# Altium PCB V_2.PcbDoc
Units mm, origin at the board's own origin, x right, y up, seen from the top; angles counter-clockwise.
Board outline 70.23 x 20.07 mm, 3 copper layers (Top Layer, GND, Bottom Layer), stack 0.615 mm thick; 5 components, 23 nets, 72 pads, 78 vias.
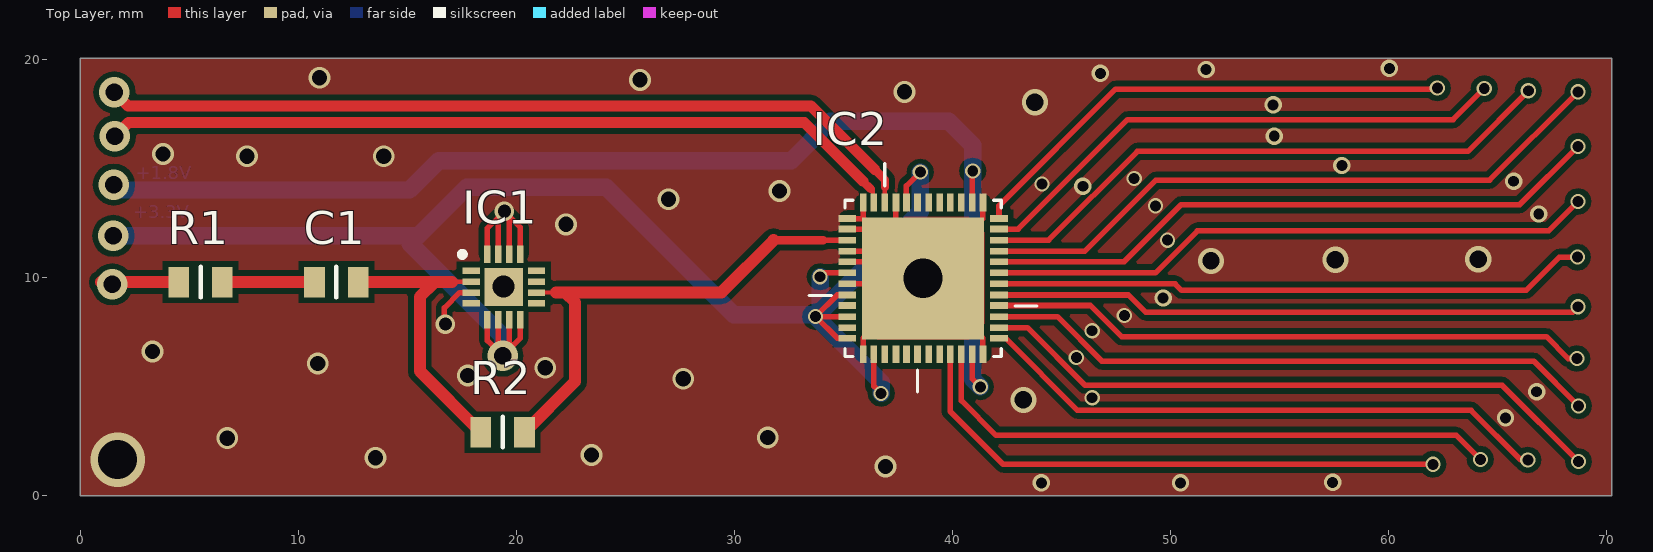
[diagram p0: Top Layer view]
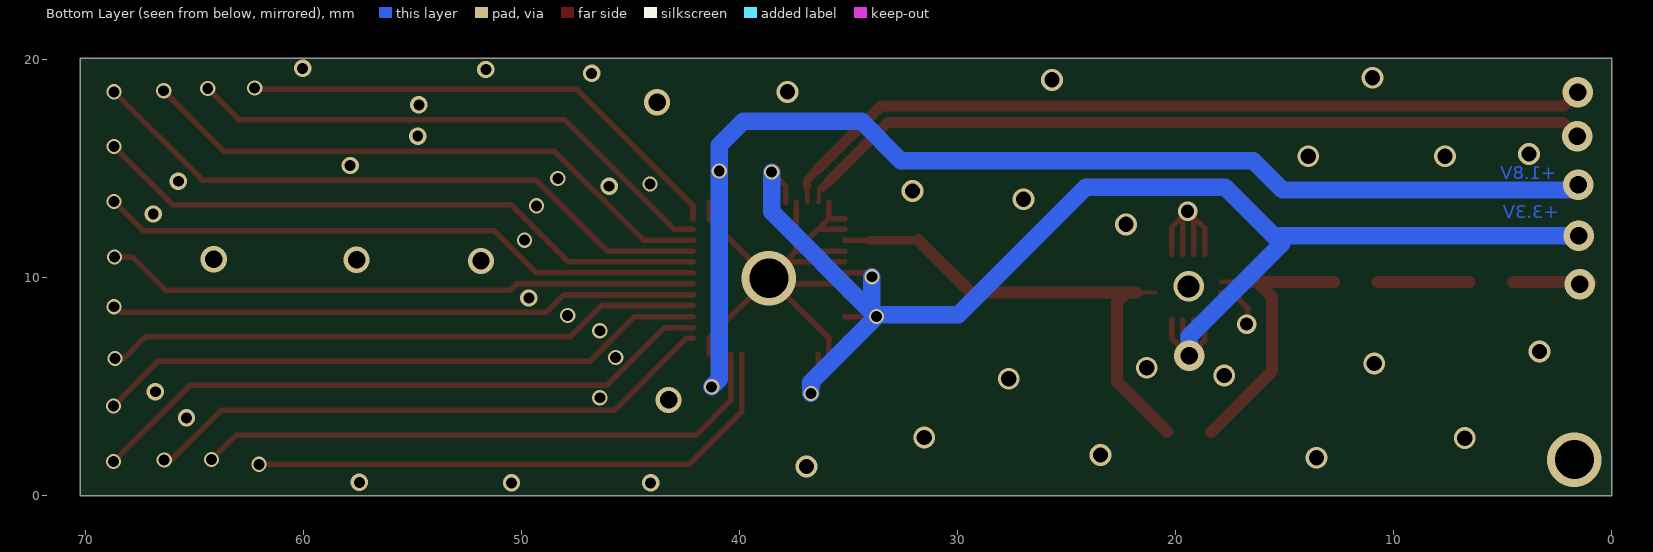
[diagram p1: Bottom Layer view, seen from below]
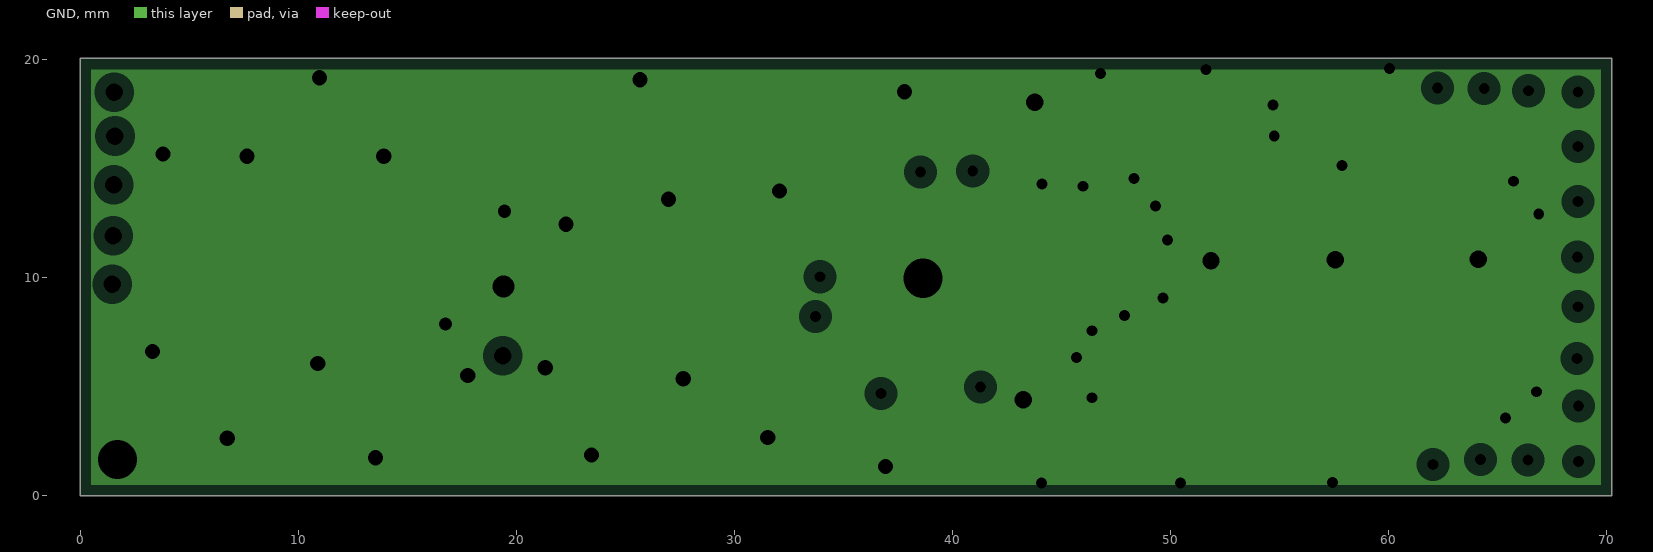
[diagram p2: GND, clearances drawn from the general rule]
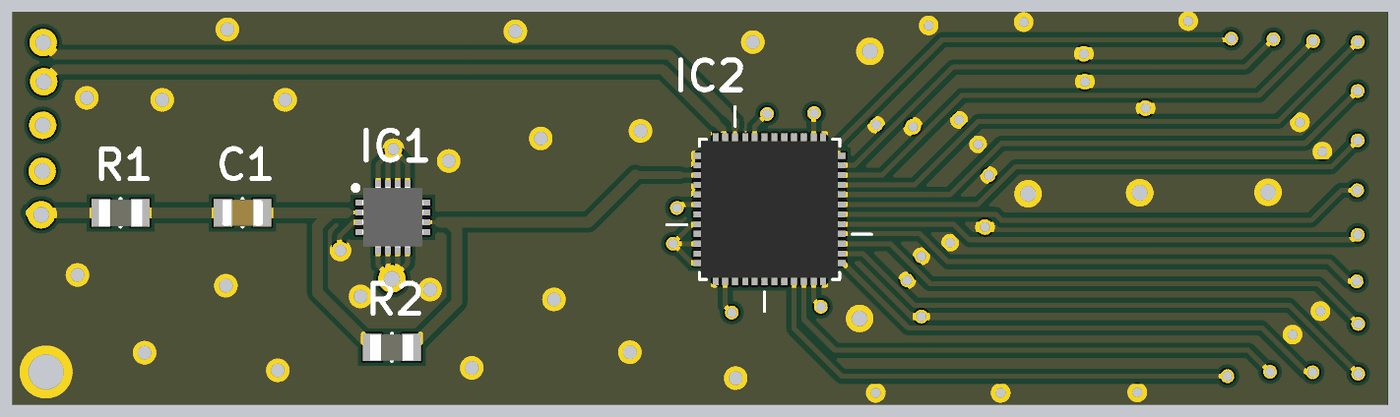
[diagram p3: 3D render of the assembled board from above, using the file's embedded part models]

## Layer stack, top to bottom
Top Solder: solder mask 0.0102, Solder Resist, Dk 3.5
Top Layer: signal copper 0.0356
Dielectric 1: core 0.254, FR-4, Dk 4.2
GND: plane copper 0.036, net GND
Dielectric 2: core 0.254, Dk 4.2
Bottom Layer: signal copper 0.0356
Bottom Solder: solder mask 0.0102, Solder Resist, Dk 3.5

## Board outline
0,0 70.231,0 70.231,20.066 0,20.066

## Design rules (kind name [scope] priority, off if disabled: settings)
Clearance [All] p1: gap=0 ignorepadtopadclearanceinfootprint=FALSE except(0.254: Arc-Fill Arc-Poly Arc-Region Track-Fill Track-Poly Track-Region SMDPad-Fill SMDPad-Poly SMDPad-Region THPad-Fill THPad-Poly THPad-Region Via-Fill Via-Poly Via-Region Fill-Fill Fill-Poly Fill-Region Poly-Poly Poly-Region Region-Region)
DiffPairsRouting [All] p1: maxlimit=0.254 minlimit=0.254 mostfreqgap=0.254 toplayer_minwidth=0.2 toplayer_maxwidth=0.5 toplayer_prefwidth=0.381 bottomlayer_minwidth=0.2 bottomlayer_maxwidth=0.5 bottomlayer_prefwidth=0.381 maxuncoupledlength=12.7
PlaneClearance [All] p1: clearance=0.508
PlaneConnect [All] p1: planeconnectstyle=Direct reliefexpansion=0.508 reliefentries=4 reliefconductorwidth=0.254 reliefairgap=0.254
PolygonConnect [All] p1: connectstyle=Direct reliefconductorwidth=0.254 reliefentries=4 polygonreliefangle="90 Angle" airgapwidth=0.254
RoutingVias [All] p1: holewidth=0.711 width=1.27 viastyle="Through Hole" minholewidth=0.711 minwidth=0.5 maxholewidth=1.8 maxwidth=2
SolderMaskExpansion [All] p1: expansion=0.102
Width [All] p1: maxlimit=1 minlimit=0.254 preferedwidth=0.55
27 further rules are at their usual default settings.

## Classes and differential pairs
differential pair NewDifferentialPair1: +clk+ -clk-

## Components (designator, comment, footprint, x,y, rotation, side; value= is the part's Value field where it differs from the comment)
C1 "=Value" Copasitor 9.988,8.784 r0 top
IC1 "ADA4932" ADA4932 17.901,8.051 r0 top
IC2 "ADS61B49" ADS61B49 35.094,13.531 r270 top
R1 "=Value" Res 7.25,10.75 r180 top
R2 "=Value" Res 21.1,3.875 r180 top

## Footprints (in the part's own frame and the unit in brackets; to place one, negate y for a bottom-side part, rotate by r counter-clockwise, add the part's x,y. Pads: shape width x height; smd on the part's side, far side on the other; paste and mask are expansions set on the pad)
ADA4932 [mm]
  rect 0.8x0.3 smd: 1(0.024,2.274) 2(0.024,1.774) 3(0.024,1.274) 4(0.024,0.774) 9(3.024,0.774) 10(3.024,1.274) 11(3.024,1.774) 12(3.024,2.274)
  rect 0.3x0.8 smd: 5(0.774,0.024) 6(1.274,0.024) 7(1.774,0.024) 8(2.274,0.024) 13(2.274,3.024) 14(1.774,3.024) 15(1.274,3.024) 16(0.774,3.024)
  rect 1.75x1.75 smd: 17(1.524,1.524)
  silkscreen extent -0.5,2.9 -0.25,3.15, body extent -0.03,-0.03 3.07,3.07, height 0.8
ADS61B49 [mil]
  rect 32x12 smd: 1(3,248) 2(3,229) 3(3,209) 4(3,189) 5(3,170) 6(3,150) 7(3,130) 8(3,110) 9(3,91) 10(3,71) 11(3,51) 12(3,32) 25(277,32) 26(277,51) 27(277,71) 28(277,91) 29(277,110) 30(277,130) 31(277,150) 32(277,170) 33(277,189) 34(277,209) 35(277,229) 36(277,248)
  rect 12x32 smd: 13(32,3) 14(51,3) 15(71,3) 16(91,3) 17(110,3) 18(130,3) 19(150,3) 20(170,3) 21(189,3) 22(209,3) 23(229,3) 24(248,3) 37(248,277) 38(229,277) 39(209,277) 40(189,277) 41(170,277) 42(150,277) 43(130,277) 44(110,277) 45(91,277) 46(71,277) 47(51,277) 48(32,277)
  rect 220x220 smd: 49(140,140)
  silkscreen extent -67,-66 345,345, body extent 2,2 278,278, height 39
Copasitor [mm]
  rect 0.95x1.4 smd: 1(0.762,1.016) 2(2.762,1.016)
  silkscreen extent 1.76,0.32 1.76,1.72, body extent 0.71,0.34 2.81,1.69, height 0.9
Res [mm]
  rect 0.95x1.4 smd: 1(0.725,0.95) 2(2.725,0.95)
  silkscreen extent 1.73,0.25 1.73,1.65, body extent 0.63,0.28 2.83,1.63, height 0.6

## Part data
C1: library part Copasitor
R1 R2: library part Resistor

## Via types
v1: diameter 0.7, hole 0.5, Top Layer to Bottom Layer, 28 vias
v2: diameter 1, hole 0.7, Top Layer to Bottom Layer, 19 vias
v3: diameter 0.8, hole 0.5, Top Layer to Bottom Layer, 15 vias
v4: diameter 1.4, hole 0.8, Top Layer to Bottom Layer, 6 vias
v5: diameter 1.2, hole 0.8, Top Layer to Bottom Layer, 5 vias
v6: diameter 2.5, hole 1.8, Top Layer to Bottom Layer, 2 vias
v7: diameter 0.9, hole 0.6, Top Layer to Bottom Layer, 2 vias
v8: diameter 1.4, hole 1, Top Layer to Bottom Layer, 1 vias

## Nets (pads, with @x,y where several pads share a name; then routed paths per layer and width w, separated by ;. In a path a pad name is that pad's centre, name@x,y a point inside that pad or via, vN(x,y) a via of type N, cw(c..) or ccw(c..) an arc to the next point about the centre after c; other vN are vias at no path point)
+1.8V: IC2.2 IC2.35 | length 55.6
  Top Layer w0.254: IC2.35 40.911,5.364 v1(41.275,5) ; IC2.2 40.911,14.886 v1(40.925,14.9)
  Bottom Layer w0.8: v4(1.55,14.275) 1.8,14.025 15.1,14.025 16.45,15.375 32.6,15.375 34.4,17.175 39.825,17.175 40.925,16.075 v1(40.925,14.9) 40.925,5.35 v1(41.275,5)
+3.3V: IC1.5 IC1.6 IC1.7 IC1.8 IC2.8 IC2.18 IC2.20 IC2.22 IC2.24 IC2.26 | length 74.8
  Top Layer w0.254: IC1.5 18.675,7.125 v4@19.175,6.625 ; IC1.6 v4@19.175,6.625 ; IC1.7 v4@19.675,6.725 ; IC1.8 20.175,7.225 v4@19.675,6.725 ; v1(33.925,10.05) 34.104,10.229 IC2.18 ; IC2.24 34.713,7.232 v1(33.722,8.222) ; IC2.22 v1(33.722,8.222) ; IC2.20 34.713,9.213 v1(33.722,8.222) ; IC2.26 36.389,5.036 v1(36.725,4.7) ; IC2.8 37.888,14.213 v1(38.525,14.85) ; v4@19.175,6.625 v4(19.375,6.425) v4@19.675,6.725
  Bottom Layer w0.8: v4(1.525,11.925) 15.5,11.925 ; v4(19.375,6.425) 19.375,7.325 15.138,11.563 15.5,11.925 ; v1(33.925,10.05) v1@33.925,8.425 ; v1(36.725,4.7) 36.725,5.22 v1(33.722,8.222) ; v1(38.525,14.85) 38.525,13.025 v1@33.925,8.425 ; 15.5,11.925 17.725,14.15 24.125,14.15 29.975,8.3 33.645,8.3 v1(33.722,8.222) ; v1(33.722,8.222) v1@33.925,8.425
clk+: IC2.10 | length 38
  Top Layer w0.2: IC2.10 36.897,14.147 36.9,14.15
  Top Layer w0.381: 36.433,14.958 36.9,14.491 36.9,14.15
  Top Layer w0.5: v4(1.575,18.5) 2.198,17.877 33.514,17.877 36.433,14.958
clk-: IC2.11 | length 36.8
  Top Layer w0.2: 36.25,14.075 36.356,13.969 36.356,13.489 IC2.11
  Top Layer w0.381: 35.9,14.425 36.25,14.075
  Top Layer w0.5: v4(1.6,16.5) 2.223,17.123 33.202,17.123 35.9,14.425
d0: IC2.33 | length 25.8
  Top Layer w0.254: IC2.33 39.895,3.88 42.325,1.45 v1(62.025,1.45)
d1: IC2.34 | length 27
  Top Layer w0.254: IC2.34 40.403,4.372 42,2.775 63.1,2.775 v1(64.2,1.675)
d2: IC2.37 | length 26.6
  Top Layer w0.254: IC2.37 42.418,7.232 45.725,3.925 63.775,3.925 66.05,1.65 v1(66.375,1.65)
d3: IC2.38 | length 29.1
  Top Layer w0.254: IC2.38 43.436,7.714 46.075,5.075 65.2,5.075 v1(68.7,1.575)
d4: IC2.39 | length 28.3
  Top Layer w0.254: IC2.39 44.803,8.222 46.85,6.175 66.65,6.175 v1(68.7,4.125)
d5: IC2.40 | length 27.5
  Top Layer w0.254: IC2.40 46.32,8.73 47.75,7.3 67.225,7.3 68.225,6.3 v1(68.625,6.3)
d6: IC2.41 | length 27
  Top Layer w0.254: IC2.41 48.062,9.213 48.85,8.425 68.425,8.425 v1(68.675,8.675)
d7: IC2.42 | length 27.3
  Top Layer w0.254: IC2.42 50.204,9.721 50.5,9.425 66.3,9.425 67.825,10.95 v1(68.65,10.95)
d8: IC2.43 | length 27.9
  Top Layer w0.254: IC2.43 49.304,10.229 51.225,12.15 67.325,12.15 v1(68.675,13.5)
d9: IC2.44 | length 28.7
  Top Layer w0.254: IC2.44 47.862,10.737 50.475,13.35 66,13.35 v1(68.675,16.025)
d10: IC2.45 | length 29.6
  Top Layer w0.254: IC2.45 46.07,11.22 49.325,14.475 64.625,14.475 v1(68.675,18.525)
d11: IC2.46 | length 27.1
  Top Layer w0.254: IC2.46 44.403,11.728 48.475,15.8 63.625,15.8 v1(66.4,18.575)
d12: IC2.47 | length 24.9
  Top Layer w0.254: IC2.47 43.011,12.236 48.025,17.25 62.95,17.25 v1(64.375,18.675)
d13: IC2.48 | length 22.9
  Top Layer w0.254: IC2.48 42.13,13.305 47.475,18.65 v1@62.225,18.65
  other v1: 62.225,18.7
GND: IC1.3 IC1.13 IC1.14 IC1.15 IC1.16 IC2.1 IC2.9 IC2.12 IC2.13 IC2.14 IC2.16 IC2.17 IC2.19 IC2.25 IC2.36 IC2.49 | length 40.9
  Top Layer w0.254: v7@16.7,7.875 16.7,8.625 17.4,9.325 IC1.3 ; IC1.16 18.675,12.275 v7@19.175,12.775 ; IC1.15 v7@19.175,12.775 ; IC1.14 v7@19.675,12.825 ; IC1.13 20.175,12.325 v7@19.675,12.825 ; IC2.19 IC2.49@38.396,9.721 ; IC2.17 IC2.49@37.888,10.737 ; IC2.16 IC2.49@37.405,11.22 ; IC2.14 36.389,12.236 IC2.49@37.405,11.22 ; IC2.13 IC2.49@35.907,12.718 ; IC2.25 35.907,7.232 IC2.49@38.396,9.721 ; IC2.12 IC2.49@35.907,12.718 ; IC2.49@36.22,12.405 IC2.49@35.907,12.718 ; IC2.9 IC2.49@37.405,11.22 ; IC2.36 41.393,7.232 v6(38.65,9.975) ; IC2.1 41.393,12.718 v6(38.65,9.975) ; v7@19.175,12.775 v7(19.45,13.05) v7@19.675,12.825 ; IC2.49@37.405,11.22 IC2.49@37.888,10.737 ; IC2.49@37.888,10.737 v6(38.65,9.975) ; IC2.49@38.396,9.721 v6(38.65,9.975)
  other v1: 46.4,4.5 45.675,6.35 46.4,7.575 47.875,8.275 49.85,11.725 49.3,13.3 44.1,14.3 48.325,14.55
  other v2: 36.925,1.35 13.55,1.75 23.45,1.875 6.75,2.65 31.525,2.675 27.65,5.375 17.775,5.525 21.325,5.875 10.9,6.075 3.325,6.625 22.275,12.45 26.975,13.6 32.065,13.985 7.65,15.575 13.925,15.575 3.8,15.675 37.8,18.525 25.675,19.075 10.975,19.175
  other v3: 44.075,0.6 50.45,0.6 57.425,0.625 65.35,3.575 66.775,4.775 49.65,9.075 66.875,12.925 45.975,14.2 65.725,14.425 57.85,15.15 54.75,16.5 54.7,17.925 46.775,19.375 51.625,19.55 60.025,19.6
  other v5: 43.25,4.4 51.85,10.775 57.55,10.825 64.1,10.85 43.775,18.05
  other v6: 1.72,1.665
  other v7: 16.75,7.875
  other v8: 19.41,9.605
NetC1_1: C1.1 R1.1 | length 4.2
  Top Layer w0.55: R1.1 C1.1
NetC1_2: C1.2 IC1.2 R2.2 | length 13.5
  Top Layer w0.2: 17.075,9.825 IC1.2
  Top Layer w0.55: C1.2 16.25,9.8 ; 17.05,9.8 16.25,9.8 ; R2.2 15.575,5.725 15.575,9.125 16.25,9.8
output: IC1.10 IC2.15 R2.1 | length 22.8
  Top Layer w0.2: IC1.10 21.825,9.325
  Top Layer w0.254: 34.072,11.728 IC2.15
  Top Layer w0.4: 31.803,11.728 34.072,11.728
  Top Layer w0.55: R2.1 22.7,5.25 22.7,8.875 22.25,9.325 ; 21.825,9.325 22.25,9.325 ; 31.803,11.728 29.4,9.325 22.25,9.325
reset: IC2.30
pads on no net: IC1.1 IC1.4 IC1.9 IC1.11 IC1.12 IC1.17 IC2.3 IC2.4 IC2.5 IC2.6 IC2.7 IC2.21 IC2.23 IC2.27 IC2.28 IC2.29 IC2.31 IC2.32 R1.2
copper on no net: | length 3.6
  Top Layer w0.254: v4@0.925,9.825 v4@0.95,9.8
  Top Layer w0.55: v4@0.95,9.8 4.525,9.8
  other v4: 1.475,9.7

## Polygon pours and split planes (outlines as drawn)
GND on Top Layer "Top Layer-GND" (solid, pour order 0): 70.25,0 70.2,0.05 70.2,20.075 0,20.075 0,0
GND on GND (split plane): 69.721,0.51 0.51,0.51 0.51,19.556 69.721,19.556

## Other copper
Top Layer:
  pour cut-out: 19.013,3.879 19.646,3.879 19.646,1.971 19.104,1.971
  pour cut-out: 11.388,10.754 12.021,10.754 12.021,8.846 11.479,8.846
  pour cut-out: 5.163,10.754 5.796,10.754 5.796,8.846 5.254,8.846
Bottom Layer:
  text "+1.8V" at 2.55,14.525 h0.6
  text "+3.3V" at 2.45,12.725 h0.6